# EAGLE board Scorching-Speothos.postroute (EAGLE 7.4.0)
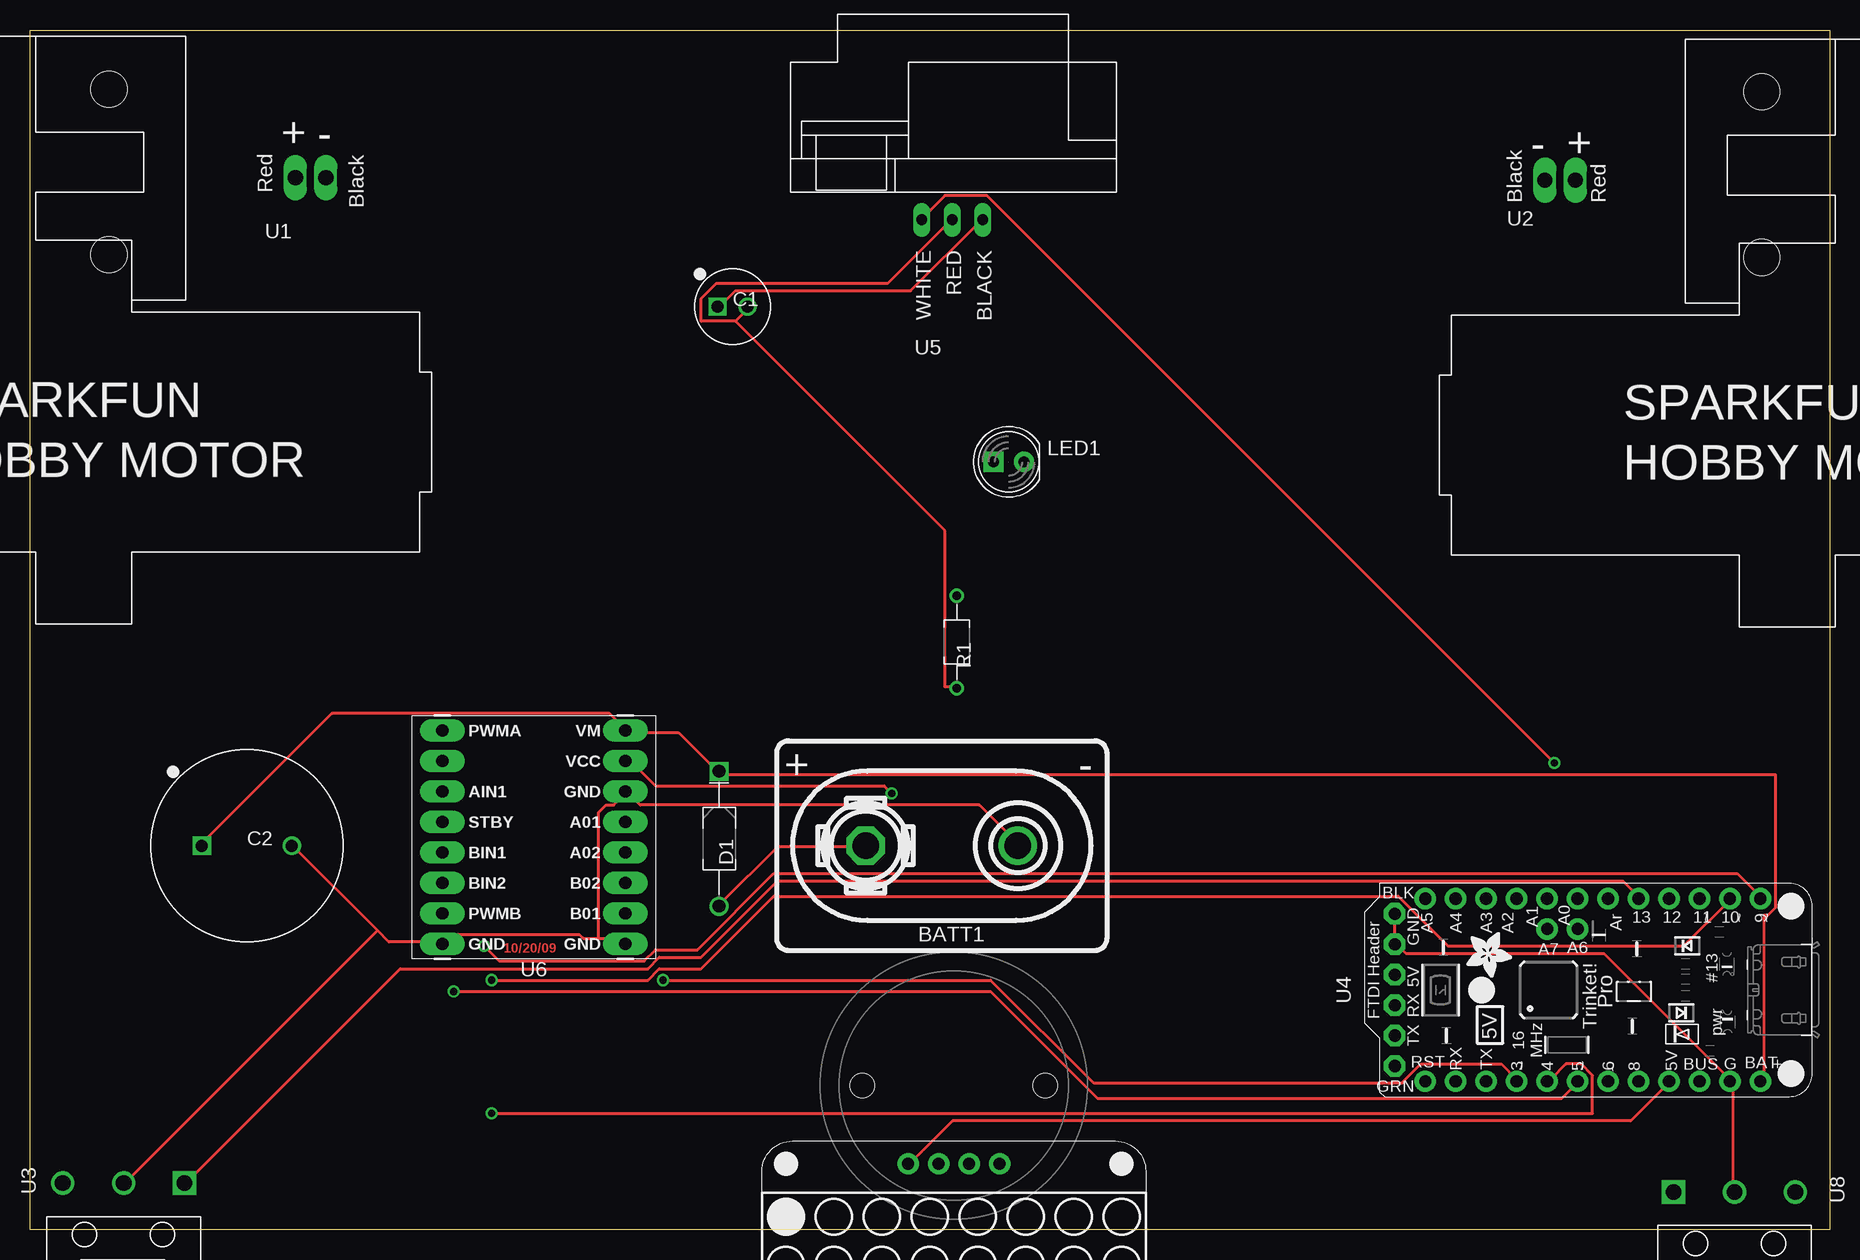
[diagram p0: board, top side]
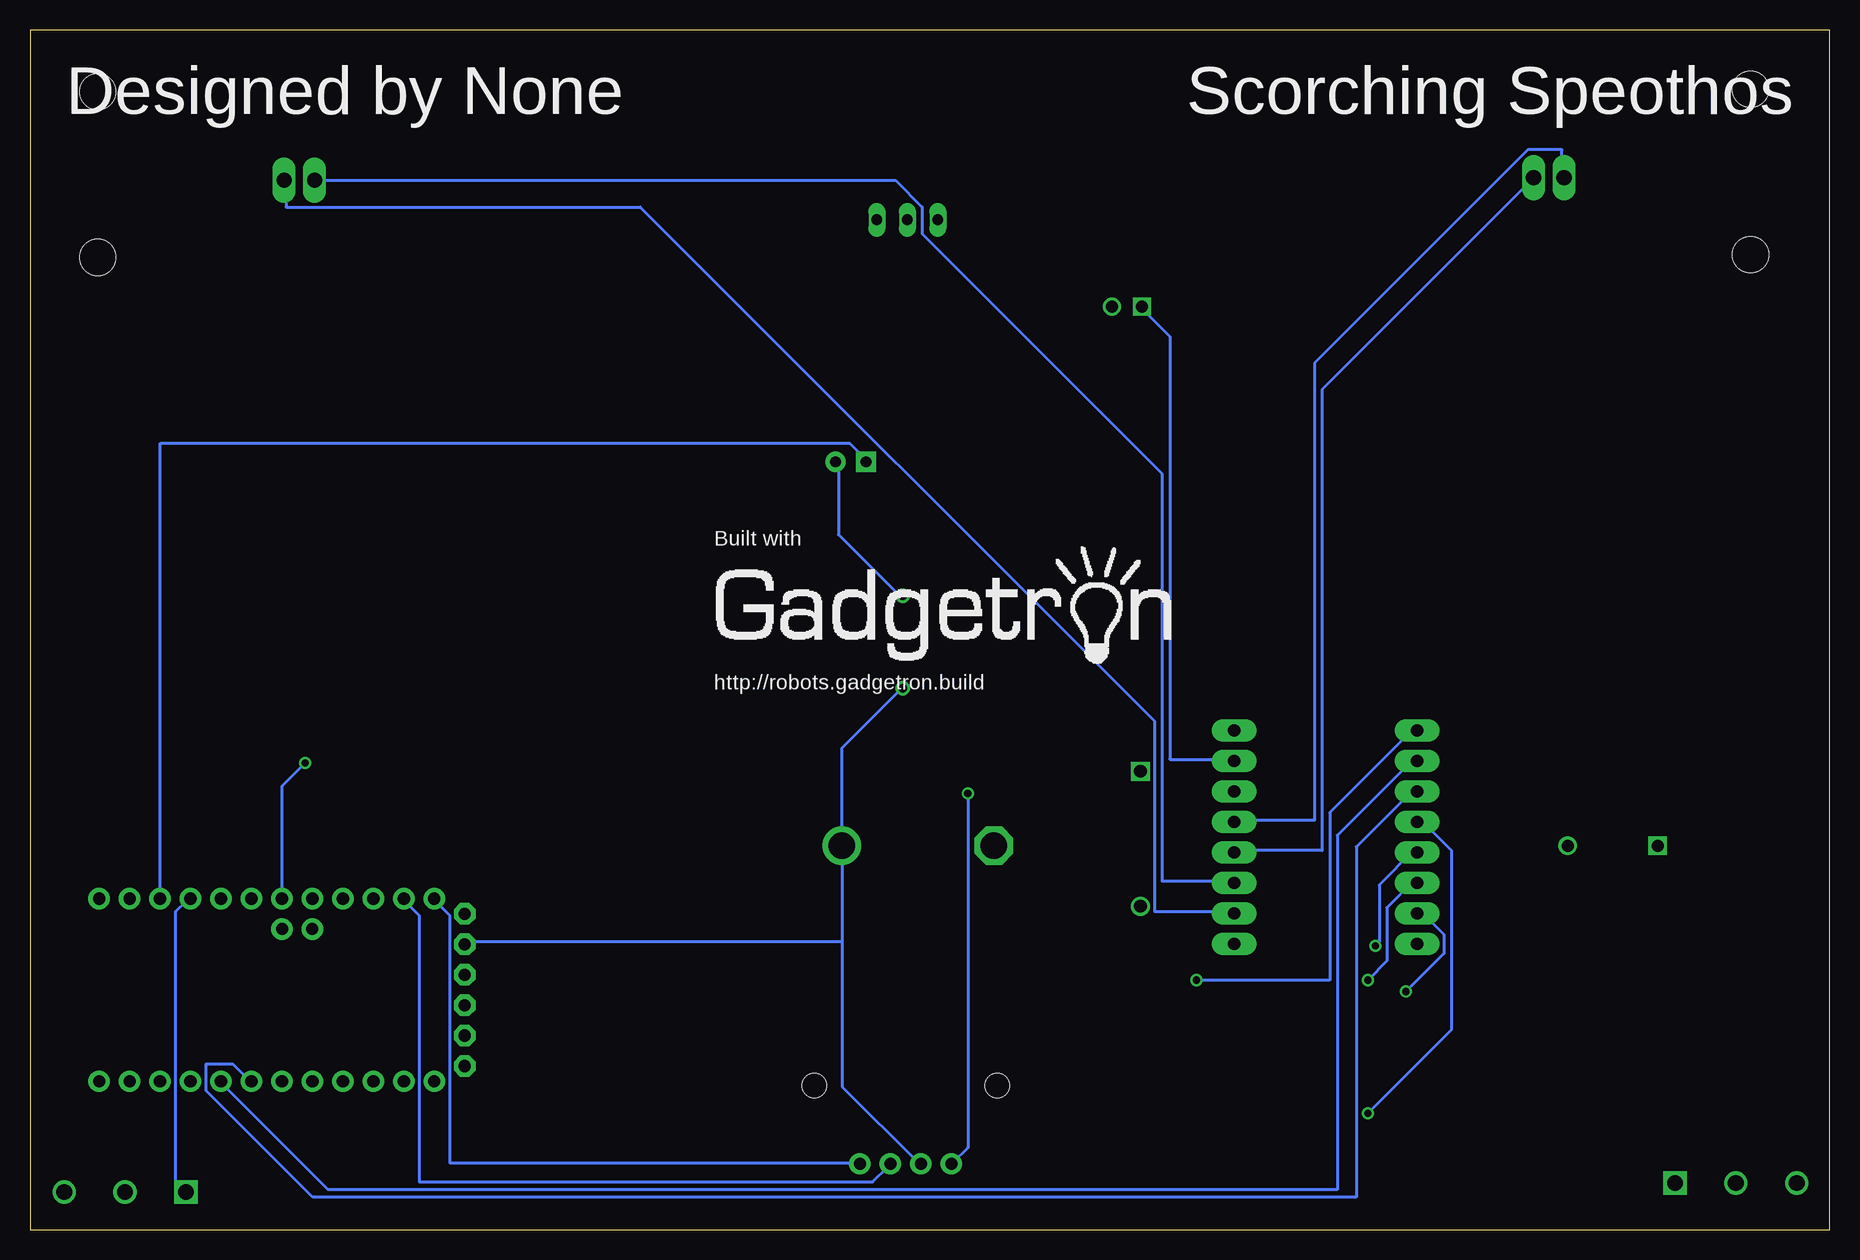
[diagram p1: board, bottom side, seen from below]

Size 150 x 100 mm. Coordinates in mm from the lower left corner, seen from the top.
Outline: 0,0 0,100 150,100 150,0 0,0
Copper layers (1*16): Top 0.035mm / dielectric 1.5mm / Bottom 0.035mm
Design rules "default": minimum track width 10mil, minimum drill 0.6mm, track to track 8mil, track to pad 8mil, pad to pad 8mil, via to via 8mil, smd to smd 8mil, copper to edge 40mil, drill to drill 8mil, minimum pad ring 10mil, minimum via ring 8mil, stop-mask expansion 4mil, vias tented up to drill 0mil, thermal gap 10mil

## Footprints (pad centres in the part's own frame; a part is rotated, then mirrored left to right if it is on the bottom)
BATTERY_9V_KEYSTONE_968 = drill 2.2: N 6.35,0 | drill 2.2 octagon: P -6.35,0
CAPPRD250W80D630H1220P = drill 1 pad 1.5 square: 1 -1.25,0 | drill 1 pad 1.5: 2 1.25,0
CAPPRD750W80D1600H2200P = drill 1 pad 1.5 square: 1 -3.75,0 | drill 1 pad 1.5: 2 3.75,0
ADAFRUIT-3/4IN-CASTER = hole 2: -7.62,0; 7.62,0
DIOAD1125W78L520D270_HS = drill 1.06 pad 1.59: A 5.625,0 | drill 1.06 pad 1.59 square: C -5.625,0
LED5MM = drill 0.9 pad 1.676 square: A -1.27,0 | drill 0.9 pad 1.676: K 1.27,0
RESAD770W45L370D210_HS = drill 0.7 pad 1.1: 1 -3.85,0; 2 3.85,0
SPARKFUN_HOBBY_MOTOR = drill 1.27 long: + 40.64,-1.27; - 43.18,-1.27 | hole 3: 25.1,-7.7; 25.1,6.1
SPARKFUN_HOBBY_MOTOR_LEFT = drill 1.27 long: + -40.64,-1.27; - -43.18,-1.27 | hole 3: -25.1,-7.7; -25.1,6.1
BUMP_SWITCH_OMRON_D2FLA1 = drill 1.3 square: A -5.08,-2.8 | drill 1.3: B 0,-2.8; NC 5.08,-2.8
ADAFRUIT-PRO-TRINKET-5V = drill 1.016 pad 1.778: +5V 7.62,24.13; A0 -7.62,16.51; A1 -7.62,13.97; A2 -7.62,11.43; A3 -7.62,8.89; A4 -7.62,6.35; A5 -7.62,3.81; AREF -7.62,19.05; D3 7.62,11.43; D4 7.62,13.97; D5 7.62,16.51; D6 7.62,19.05; D8 7.62,21.59; D9 -7.62,31.75; D10 -7.62,29.21; D11 -7.62,26.67; D12 -7.62,24.13; D13 -7.62,21.59; GND2 7.62,29.21; RESET 7.62,3.81; RXD1 7.62,6.35; TXD1 7.62,8.89; VBAT 7.62,31.75; VBUS1 7.62,26.67 | drill 1 pad 1.778: A6 -5.08,16.51; A7 -5.08,13.97 | drill 1.016 pad 1.778 octagon: DTR/RTS 6.35,1.27; GND -6.35,1.27; GND1 -3.81,1.27; RXD 1.27,1.27; TXD 3.81,1.27; VBUS -1.27,1.27
ANALOG_DISTANCE_SENSOR_GLUE_MOUNT = drill 0.9 long: GND 0.18,-9.977; VCC 2.72,-9.977; VO -2.36,-9.977
SPARKFUN_DUAL_MOTOR_DRIVER = drill 1.016 pad 1.88 long: A01 7.62,1.27; A02 7.62,-1.27; AIN1 -7.62,3.81; AIN2 -7.62,6.35; B01 7.62,-6.35; B02 7.62,-3.81; BIN1 -7.62,-1.27; BIN2 -7.62,-3.81; GND -7.62,-8.89; GND1 7.62,3.81; GND2 7.62,-8.89; PWMA -7.62,8.89; PWMB -7.62,-6.35; STBY -7.62,1.27; VCC 7.62,6.35; VM 7.62,8.89
ADAFRUIT-1.2IN-8X8-LED-BACKPACK = drill 1.016 pad 1.778: GND -18.415,-1.27; SCL -18.415,3.81; SDA -18.415,1.27; VDD -18.415,-3.81
BUMP_SWITCH_OMRON_D2FLA = drill 1.3 square: A 5.08,-2.8 | drill 1.3: B 0,-2.8; NC -5.08,-2.8

## Placement (x,y rotation side)
BATT1  BATTERY-9V-VERTICAL  [BATTERY_9V_KEYSTONE_968]  76,32 0 top
C1  100uF  [CAPPRD250W80D630H1220P]  58.57,76.95 0 top
C2  3300uF  [CAPPRD750W80D1600H2200P]  18.08,32 0 top
CASTER1  CASTERADAFRUIT-3/4IN  [ADAFRUIT-3/4IN-CASTER]  77,12 0 top
D1  [DIOAD1125W78L520D270_HS]  57.44,32.57 270 top
LED1  [LED5MM]  81.58,64 0 top
LOGO  [BUILT_WITH_GADGETRON]  75,50 0 bottom
R1  330  [RESAD770W45L370D210_HS]  77.25,48.98 270 top
U1  SOLARBOTICS_GM2SPARKFUN_HOBBY  [SPARKFUN_HOBBY_MOTOR]  -18.52,88.96 0 top
U2  SOLARBOTICS_GM2_LEFTSPARKFUN_HOBBY  [SPARKFUN_HOBBY_MOTOR_LEFT]  169.46,88.75 0 top
U3  BUMP_SWITCH-MEDIUM-RIGHT  [BUMP_SWITCH_OMRON_D2FLA1]  7.81,1.08 180 top
U4  ADAFRUIT-PRO-TRINKET-5V-BOB  [ADAFRUIT-PRO-TRINKET-5V]  112.49,19.97 270 top
U5  ANALOG_DISTANCE_SENSOR-GLUE  [ANALOG_DISTANCE_SENSOR_GLUE_MOUNT]  76.69,94.16 0 top
U6  SPARKFUN_DUAL_MOTOR_DRIVER-BOB  [SPARKFUN_DUAL_MOTOR_DRIVER]  42,32.71 0 top
U7  ADAFRUIT-1.2IN-8X8-LED-BACKPACK-WHITE  [ADAFRUIT-1.2IN-8X8-LED-BACKPACK]  77.01,-12.94 270 top
U8  BUMP_SWITCH-MEDIUM-LEFT  [BUMP_SWITCH_OMRON_D2FLA]  142.07,0.34 180 top

## Library data of the parts
BATT1 = Components; DIST: Digikey; DISTPN: 36-968-ND; HIERARCHY_NAME: battery.BATT1
C1 = KoalaBuild; DATASHEET: http://industrial.panasonic.com/www-cgi/jvcr13pz.cgi?E+PZ+3+ABA0012+ECA1EM101+7+WW; DATA_SHEET: http://industrial.panasonic.com/www-cgi/jvcr13pz.cgi?E+PZ+3+ABA0012+ECA1EM101+7+WW; DB: /Users/swanson/research/NVSL/src/with-git/gtron_devel/Gadgets/Tools/Koala/Koala/PartLibrary/Digikey/Capacitors-AluminumTH.csv; DEVICE: TH-RADIAL_ALUMINUM_6.3MM; DIST: Digikey; DISTPN: P5152-ND; HIERARCHY_NAME: distanceSensor.C1; IMAGE: http://media.digikey.com/Photos/Panasonic%20Photos/ECA-1EM101B.JPG; MFR: Panasonic Electronic Components; MIN_QTY: 1; MPN: ECA-1EM101; PACKAGE: CAPPRD250W80D630H1220P; PRICE: $0.25; SIZE: TH; STOCK: STOCK; TOL: 20%; VALUE_QUERY: >10uF; VOLTS: ( >= 5)V
C2 = KoalaBuild; DATASHEET: http://industrial.panasonic.com/www-cgi/jvcr13pz.cgi?E+PZ+3+ABA0012+ECA1EM332+7+WW; DATA_SHEET: http://industrial.panasonic.com/www-cgi/jvcr13pz.cgi?E+PZ+3+ABA0012+ECA1EM332+7+WW; DB: /Users/swanson/research/NVSL/src/with-git/gtron_devel/Gadgets/Tools/Koala/Koala/PartLibrary/Digikey/Capacitors-AluminumTH.csv; DEVICE: TH-RADIAL_ALUMINUM_16MM; DIST: Digikey; DISTPN: P5158-ND; HIERARCHY_NAME: drive.C1; IMAGE: http://media.digikey.com/Photos/Panasonic%20Photos/ECA-1CM472.jpg; MFR: Panasonic Electronic Components; MIN_QTY: 1; MPN: ECA-1EM332; PACKAGE: CAPPRD750W80D1600H2200P; PRICE: $1.13; SIZE: TH; STOCK: STOCK; TOL: 20%; VALUE_QUERY: >3000uF; VOLTS: ( >= 5)V
CASTER1 = Components; DIST: Adafruit; DISTPN: 1200; HIERARCHY_NAME: caster.u1
D1 = KoalaBuild; DATASHEET: http://www.st.com/web/en/resource/technical/document/datasheet/CD00001625.pdf; DATA_SHEET: http://www.st.com/web/en/resource/technical/document/datasheet/CD00001625.pdf; DB: /home/buildserver/gtron_devel/Gadgets/Tools/Koala/Koala/PartLibrary/Digikey/Schottky-Diodes-TH.csv; DEVICE: TH-DO-41-AND-DO-204AL; DIST: Digikey; DISTPN: 497-4547-1-ND; HIERARCHY_NAME: battery.D1; IMAGE: http://media.digikey.com/photos/STMicro%20Photos/1N5819.JPG; IRECT: 1A; MFR: STMicroelectronics; MIN_QTY: 1; MPN: 1N5817; PACKAGE: DIOAD1125W78L520D270_HS; PRICE: $0.57; SIZE: TH; STOCK: STOCK; VALUE: 450mV; VREV: 20V
LED1 = Components; DIST: Adafruit; DISTPN: 754; HIERARCHY_NAME: led.LED1
LOGO = Artwork
R1 = KoalaBuild; CASE: TH; DATASHEET: http://www.yageo.com/NewPortal/yageodocoutput?fileName=/pdf/throughhole/Yageo_LR_CFR_2013.pdf; DATA_SHEET: http://www.yageo.com/NewPortal/yageodocoutput?fileName=/pdf/throughhole/Yageo_LR_CFR_2013.pdf; DB: /home/buildserver/gtron_devel/Gadgets/Tools/Koala/Koala/PartLibrary/Digikey/Resistors-TH.csv; DEVICE: TH-1/6W-CARBON; DIST: Digikey; DISTPN: 330EBK-ND; HIERARCHY_NAME: led.R1; IMAGE: http://media.digikey.com/Renders/Yageo%20Renders/CFR-12JR-330R.jpg; MFR: Yageo; MIN_QTY: 1; MPN: CFR-12JB-52-330R; PACKAGE: RESAD770W45L370D210_HS; PRICE: $0.10; PWR: 167mW; SIZE: TH; STOCK: STOCK; TOL: 5%; VALUE_QUERY: 330
U1 = Components; DIST: Sparkfun; DISTPN: 13258-assembly; HIERARCHY_NAME: drive.R
U2 = Components; DIST: Sparkfun; DISTPN: 13258-assembly; HIERARCHY_NAME: drive.L
U3 = Components; DIST: Digikey; DISTPN: SW842-ND; HIERARCHY_NAME: bump_2.U$2
U4 = BOBs; DIST: Adafruit; DISTPN: 2000; HIERARCHY_NAME: brain.U1
U5 = Components; DIST: Pololu; DISTPN: 2450; HIERARCHY_NAME: distanceSensor.D1
U6 = BOBs; DIST: Sparkfun; DISTPN: 9457; HIERARCHY_NAME: drive.DRVR
U7 = BOBs; DIST: Adafruit; DISTPN: 1614; HIERARCHY_NAME: display.u1
U8 = Components; DIST: Digikey; DISTPN: SW843-ND; HIERARCHY_NAME: bump.U$2

## Nets
+5V_0_BRAIN: C1.1 U4.+5V U5.VCC U6.VCC U7.VDD
A0_0_BRAIN: U4.A0 U5.VO
A1_0_BRAIN: U4.A1
A01_4_DRIVE: U1.+ U6.A01
A2_0_BRAIN: U4.A2
A02_4_DRIVE: U1.- U6.A02
A3_0_BRAIN: U4.A3
A4_0_BRAIN: U4.A4 U7.SDA
A5_0_BRAIN: U4.A5 U7.SCL
A6_0_BRAIN: U4.A6
A7_0_BRAIN: U4.A7
AREF_0_BRAIN: U4.AREF
B01_4_DRIVE: U2.+ U6.B01
B02_4_DRIVE: U2.- U6.B02
D3_0_BRAIN: U4.D3 U6.PWMA
D4_0_BRAIN: U4.D4 U6.STBY
D5_0_BRAIN: U4.D5 U6.PWMB
D6_0_BRAIN: U4.D6 U6.AIN1
D8_0_BRAIN: U4.D8 U6.AIN2
D9_0_BRAIN: U4.D9 U6.BIN1
D10_0_BRAIN: U4.D10 U6.BIN2
D11_0_BRAIN: LED1.A U4.D11
D12_0_BRAIN: U4.D12 U8.A
D13_0_BRAIN: U3.A U4.D13
DTR/RTS_0_BRAIN: U4.DTR/RTS
GND_0_BRAIN: BATT1.N C1.2 C2.2 R1.2 U3.B U4.GND U4.GND1 U4.GND2 U5.GND U6.GND U6.GND1 U6.GND2 U7.GND U8.B
N$1_1_BATTERY: BATT1.P D1.A
N$1_6_LED: LED1.K R1.1
POS_1_BATTERY: C2.1 D1.C U4.VBAT U6.VM
RESET_0_BRAIN: U4.RESET
RXD1_0_BRAIN: U4.RXD1
RXD_0_BRAIN: U4.RXD
TXD1_0_BRAIN: U4.TXD1
TXD_0_BRAIN: U4.TXD
VBUS1_0_BRAIN: U4.VBUS1
VBUS_0_BRAIN: U4.VBUS

## Tracks (layer width: path | path; a pad name or v marks a point on that pad's centre or on a via)
+5V_0_BRAIN  (via drill 0.6)
  Top 0.254: U7.VDD 73.41,5.55 76.91,9.04 133.42,9.04 136.59,12.22 U4.+5V | C1.1 57.54,76.99 58.81,78.26 73.41,78.26 79.13,83.97 U5.VCC | U6.VCC 49.92,38.89 50.23,38.89 52.14,36.98 71.19,36.98 v71.83,36.35
  Bottom 0.254: U7.VDD 73.09,5.55 71.83,6.82 v71.83,36.35 | C1.1 57.22,76.67 55,74.45 55,39.2 49.92,39.2 U6.VCC
A0_0_BRAIN  (via drill 0.6)
  Top 0.254: U5.VO 74.36,84.29 76.27,86.19 79.76,86.19 v127.07,38.89
  Bottom 0.254: v127.07,38.89 128.97,36.98 128.97,27.77 U4.A0
A01_4_DRIVE
  Bottom 0.254: U6.A01 49.6,34.12 42.93,34.12 42.93,72.22 25.15,90 22.3,90 22.3,87.78 U1.+
A02_4_DRIVE
  Bottom 0.254: U6.A02 49.6,31.59 42.3,31.59 42.3,70 24.84,87.47 U1.-
A4_0_BRAIN
  Bottom 0.254: U7.SDA 78.49,5.23 79.76,3.96 117.55,3.96 117.55,26.19 118.81,27.46 U4.A4
A5_0_BRAIN
  Bottom 0.254: U4.A5 116.28,27.46 115,26.19 115,5.55 81.03,5.55 U7.SCL
B01_4_DRIVE
  Bottom 0.254: U6.B01 49.92,26.5 56.27,26.5 56.27,42.38 99.13,85.24 128.66,85.24 128.66,87.47 U2.+
B02_4_DRIVE
  Bottom 0.254: U6.B02 49.92,29.05 55.63,29.05 55.63,63.02 75.64,83.02 75.64,85.24 77.86,87.47 126.12,87.47 U2.-
D3_0_BRAIN  (via drill 0.6)
  Top 0.254: v52.77,20.79 80.08,20.79 88.65,12.22 114.37,12.22 115.96,13.8 122.62,13.8 123.9,12.53 U4.D3
  Bottom 0.254: v52.77,20.79 41.66,20.79 41.66,34.76 34.68,41.74 U6.PWMA
D4_0_BRAIN  (via drill 0.6)
  Top 0.254: v38.49,9.68 130.25,9.68 130.25,12.85 129.29,13.8 128.02,13.8 126.75,12.53 U4.D4
  Bottom 0.254: U6.STBY 34.36,33.81 33.73,33.81 31.5,31.59 31.5,16.66 v38.49,9.68
D5_0_BRAIN  (via drill 0.6)
  Top 0.254: v35.31,19.84 80.08,19.84 88.97,10.95 127.7,10.95 128.97,12.22 U4.D5
  Bottom 0.254: U6.PWMB 34.36,26.19 33.73,26.19 32.14,24.6 32.14,23.01 v35.31,19.84
D6_0_BRAIN
  Bottom 0.254: U6.AIN1 34.68,36.66 39.44,31.9 39.44,2.69 126.44,2.69 135.32,11.58 135.32,13.8 133.1,13.8 131.83,12.53 U4.D6
D8_0_BRAIN
  Bottom 0.254: U6.AIN2 34.68,39.2 41.03,32.86 41.03,3.33 125.16,3.33 134.06,12.22 U4.D8
D9_0_BRAIN  (via drill 0.6)
  Top 0.254: v37.85,23.65 39.12,22.38 51.19,22.38 52.14,23.33 55.63,23.33 61.98,29.68 142.31,29.68 144.22,27.77 U4.D9
  Bottom 0.254: v37.85,23.65 37.53,23.96 37.53,28.73 34.68,31.59 U6.BIN1
D10_0_BRAIN  (via drill 0.6)
  Top 0.254: v38.49,20.79 51.5,20.79 52.46,21.74 55.95,21.74 61.98,27.77 114.05,27.77 118.18,23.65 137.87,23.65 141.68,27.46 U4.D10
  Bottom 0.254: v38.49,20.79 36.9,22.38 36.9,26.82 34.68,29.05 U6.BIN2
D11_0_BRAIN
  Bottom 0.254: LED1.A 80.4,64.29 81.67,65.56 139.13,65.56 139.13,27.77 U4.D11
D12_0_BRAIN
  Bottom 0.254: U4.D12 136.91,27.46 137.87,26.5 137.87,3.96 137.23,3.33 U8.A
D13_0_BRAIN
  Top 0.254: U3.A 13.09,3.96 30.87,21.74 51.5,21.74 52.46,22.7 55.95,22.7 62.3,29.05 132.78,29.05 134.06,27.77 U4.D13
GND_0_BRAIN
  Top 0.254: C1.2 59.76,76.67 58.81,75.72 | 58.81,75.72 55.95,75.72 55.95,77.62 57.22,78.89 71.51,78.89 76.59,83.97 U5.GND | U6.GND2 49.6,23.96 49.28,24.28 47.38,24.28 | 47.38,24.28 47.38,34.76 48.01,35.39 48.65,35.39 49.6,36.35 U6.GND1 49.92,36.35 50.87,35.39 79.13,35.39 82.3,32.22 BATT1.N | 47.38,24.28 46.11,24.28 45.79,24.6 35.31,24.6 34.68,23.96 U6.GND 34.36,23.96 29.91,23.96 28.96,24.92 | 28.96,24.92 21.98,31.9 C2.2 | 28.96,24.92 8.01,3.96 U3.B | 58.81,75.72 76.27,58.26 76.27,45.24 77.22,45.24 R1.2 | U4.GND 113.73,26.19 113.73,23.96 U4.GND1 114.05,23.65 114.69,23.01 131.2,23.01 141.68,12.53 U4.GND2 141.99,12.22 141.99,3.33 U8.B
  Bottom 0.254: U7.GND 75.95,5.55 82.3,11.9 82.3,23.96 | R1.2 77.54,44.92 82.3,40.16 82.3,32.22 BATT1.N 82.3,31.9 82.3,23.96 | U4.GND1 113.73,23.96 82.3,23.96
N$1_1_BATTERY
  Top 0.254: D1.A 57.54,27.14 62.3,31.9 69.6,31.9 BATT1.P
N$1_6_LED
  Bottom 0.254: R1.1 77.54,52.86 82.62,57.94 82.62,63.97 LED1.K
POS_1_BATTERY
  Top 0.254: C2.1 14.36,32.22 25.15,43.02 48.33,43.02 49.6,41.74 U6.VM 49.92,41.43 54.05,41.43 57.22,38.25 D1.C 57.54,37.94 145.49,37.94 145.49,26.82 144.85,26.19 144.53,26.19 144.53,12.53 U4.VBAT

## Text on the board
bPlace: Scorching Speothos | Designed by None